# EAGLE board hs_ctia (EAGLE 7.2.0)
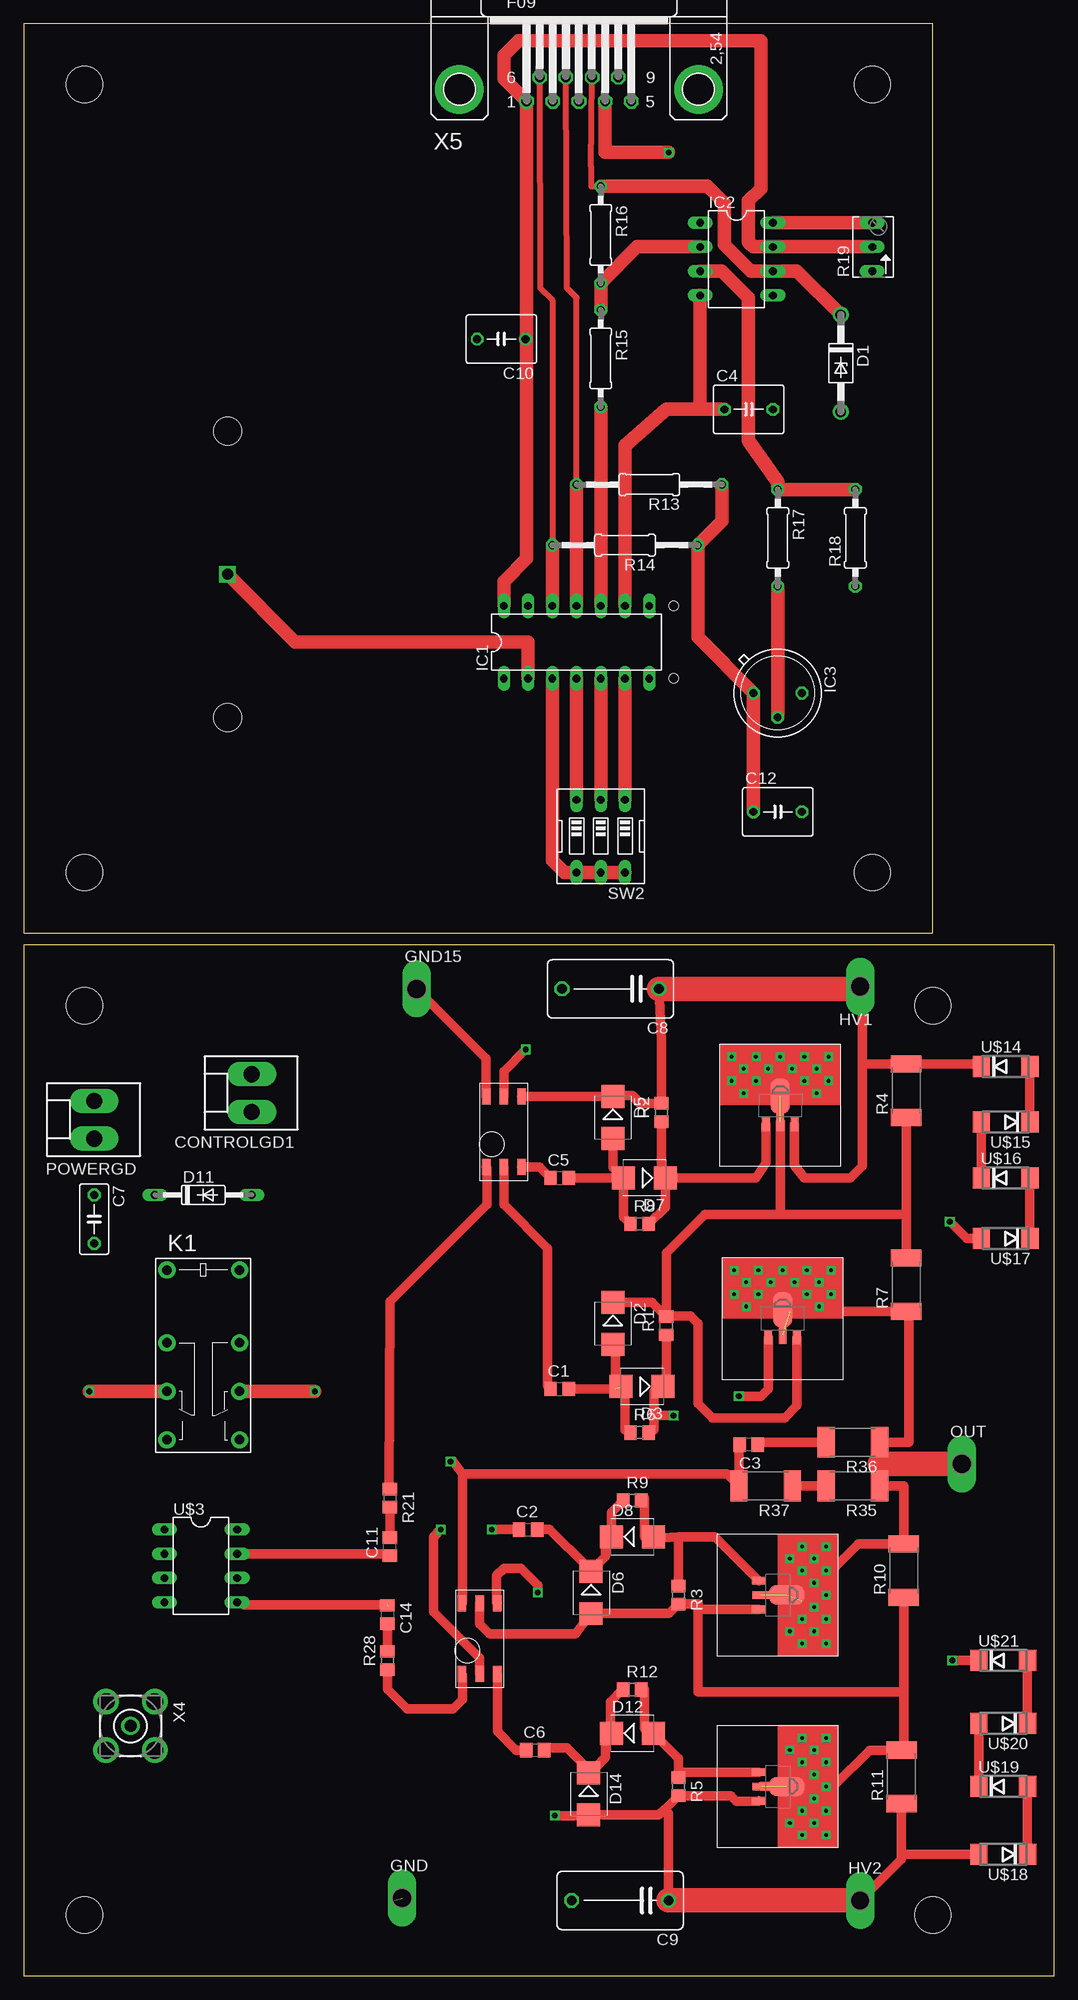
[diagram p0: board, top side]
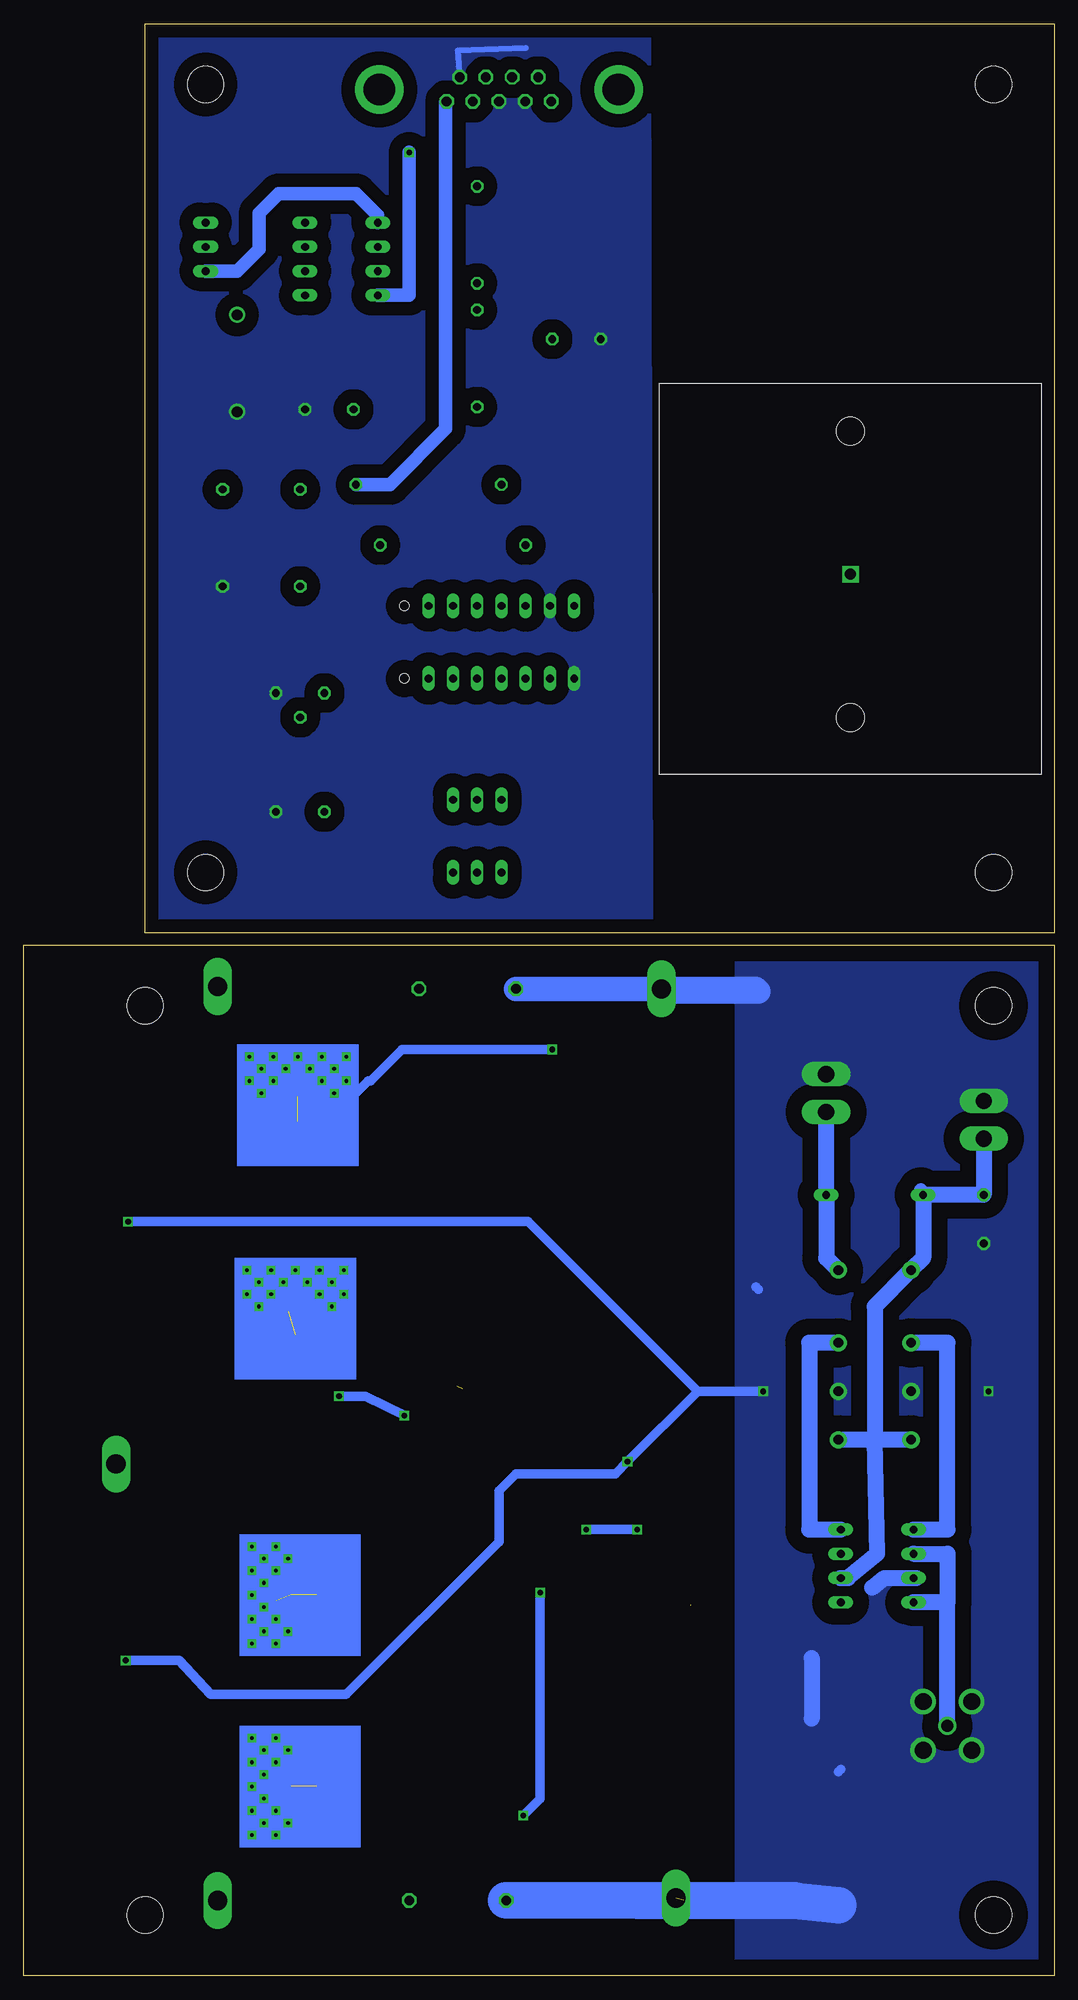
[diagram p1: board, bottom side, seen from below]

Size 107.95 x 204.47 mm. Coordinates in mm from the lower left corner, seen from the top.
Outline: 0,0 107.95,0 107.95,107.95 0,107.95 0,0
Outline: 0,109.22 95.25,109.22 95.25,204.47 0,204.47 0,109.22
Copper layers (1*16): Top 0.035mm / dielectric 1.5mm / Bottom 0.035mm
Design rules "default": minimum track width 10mil, minimum drill 24mil, track to track 8mil, track to pad 8mil, pad to pad 8mil, via to via 8mil, smd to smd 8mil, copper to edge 40mil, drill to drill 8mil, minimum pad ring 10mil, minimum via ring 8mil, stop-mask expansion 4mil, vias tented up to drill 0mil, thermal gap 10mil
Holes 3.8 mm at 95.25,101.6 95.25,6.35 6.35,6.35 6.35,101.6 6.35,198.12 88.9,198.12 88.9,115.57 6.35,115.57
Holes 1 mm at 68.07,143.51 68.07,135.89

## Footprints (pad centres in the part's own frame; a part is rotated, then mirrored left to right if it is on the bottom)
C0805 = smd 1.3 x 1.5: 1 -0.95,0; 2 0.95,0
C050-050X075 = drill 0.813 octagon: 1 -2.54,0; 2 2.54,0
C050-030X075 = drill 0.813 octagon: 1 -2.54,0; 2 2.54,0
C102-064X133 = drill 1.016 octagon: 1 -5.08,0; 2 5.08,0
KK-156-2 = drill 1.7 pad 2.184 long: 1 -1.98,0; 2 1.98,0
DO41Z10 = drill 1.118: A 5.08,0; C -5.08,0
SMB = smd 2.4 x 2.4: A 2.2,0; C -2.2,0
DO35-10 = drill 0.813 long: A 5.08,0; C -5.08,0
P1-20Y = drill 2.007 pad 2.54 long: TP 0,0
DIL14 = drill 0.813 long: 1 -7.62,-3.81; 2 -5.08,-3.81; 3 -2.54,-3.81; 4 0,-3.81; 5 2.54,-3.81; 6 5.08,-3.81; 7 7.62,-3.81; 8 7.62,3.81; 9 5.08,3.81; 10 2.54,3.81; 11 0,3.81; 12 -2.54,3.81; 13 -5.08,3.81; 14 -7.62,3.81
DIL08 = drill 0.813 long: 1 -3.81,-3.81; 2 -1.27,-3.81; 3 1.27,-3.81; 4 3.81,-3.81; 5 3.81,3.81; 6 1.27,3.81; 7 -1.27,3.81; 8 -3.81,3.81
TO39 = drill 0.813 octagon: 1 0,-2.54; 2 2.54,0; 3 0,2.54
G5V-2 = drill 1 pad 1.8: 1 -8.89,-3.81; 4 -1.27,-3.81; 6 3.81,-3.81; 8 8.89,-3.81; 9 8.89,3.81; 11 3.81,3.81; 13 -1.27,3.81; 16 -8.89,3.81
R0805 = smd 1.3 x 1.5: 1 -0.95,0; 2 0.95,0
R2512 = smd 1.8 x 3.2: 1 -2.8,0; 2 2.8,0
0207/15 = drill 0.813 octagon: 1 -7.62,0; 2 7.62,0
0207/10 = drill 0.813 octagon: 1 -5.08,0; 2 5.08,0
B64Y = drill 0.813 long: A 2.54,0; E -2.54,0; S 0,0
EDG-03 = drill 0.813 long: 1 -2.54,-3.81; 2 0,-3.81; 3 2.54,-3.81; 4 2.54,3.81; 5 0,3.81; 6 -2.54,3.81
SMD6 = smd 1.676 x 0.889: P$1 -3.696,1.854; P$2 -3.696,0; P$3 -3.696,-1.854; P$4 3.696,-1.854; P$5 3.696,0; P$6 3.696,1.854
SO89_HS = smd 0.8 x 1.4: B -1.499,-1.981; E 1.499,-1.981 | smd 0.8 x 1.9: C 0,-1.727 | smd 2.032 x 3.65: C@1 0,0.94 | drill 0.381 pad 0.61 square: P$1 -3.81,3.81; P$2 -1.27,3.81; P$3 1.27,3.81; P$4 3.81,3.81; P$5 3.81,1.27; P$8 -3.81,1.27; P$9 -2.54,5.08; P$10 -5.08,2.54; P$11 -2.54,2.54; P$12 -5.08,5.08; P$13 0,5.08; P$14 2.54,5.08; P$15 5.08,5.08; P$16 5.08,2.54; P$17 2.54,2.54
CTIA = drill 1.143 square: P$1 0,0 | hole 2.946: 14.999,0; -14.999,0
DO214AA = smd 1.8 x 2.2: A 2.55,0; C -2.55,0
BU-SMA-V = drill 1.27: 1 0,0 | drill 1.778: 2 -2.55,2.55; 3 2.55,2.55; 4 2.55,-2.55; 5 -2.55,-2.55
F09HP = drill 1.016 octagon: 1 -5.486,-1.27; 2 -2.743,-1.27; 3 0,-1.27; 4 2.743,-1.27; 5 5.486,-1.27; 6 -4.115,1.27; 7 -1.372,1.27; 8 1.372,1.27; 9 4.115,1.27 | drill 3.302 pad 5.08: G1 -12.522,0; G2 12.522,0

## Placement (x,y rotation side)
C1  1u  [C0805]  56.13,61.47 0 top
C2  1u  [C0805]  52.83,46.74 0 top
C3  10n  [C0805]  75.95,55.63 180 top
C4  10n  [C050-050X075]  75.95,164.08 0 top
C5  1u  [C0805]  56.13,83.57 0 top
C6  1u  [C0805]  53.59,23.62 0 top
C7  10n  [C050-030X075]  7.37,79.25 270 top
C8  10p  [C102-064X133]  61.47,103.38 180 top
C9  10p  [C102-064X133]  62.48,7.87 180 top
C10  10n  [C050-050X075]  50.04,171.45 180 top
C11  1u  [C0805]  38.35,44.96 90 top
C12  10n  [C050-050X075]  78.99,121.92 0 top
C14  1u  [C0805]  38.1,37.85 270 top
CONTROLGD1  [KK-156-2]  23.88,92.46 90 top
D1  [DO41Z10]  85.6,168.91 270 top
D2  1SMB5918BT3G  [SMB]  61.72,68.33 270 top
D3  [SMB]  64.77,61.72 180 top
D5  1SMB5918BT3G  [SMB]  61.72,89.92 270 top
D6  1SMB5918BT3G  [SMB]  59.44,40.13 270 top
D7  [SMB]  65.02,83.57 180 top
D8  [SMB]  63.75,45.97 0 top
D11  1N4148DO35-10  [DO35-10]  18.8,81.79 0 top
D12  [SMB]  63.75,25.4 0 top
D14  1SMB5918BT3G  [SMB]  59.18,19.05 270 top
GND  TPPAD1-20Y  [P1-20Y]  39.62,8.13 0 top
GND15  TPPAD1-20Y  [P1-20Y]  41.15,103.38 0 top
HV1  TPPAD1-20Y  [P1-20Y]  87.63,103.63 180 top
HV2  TPPAD1-20Y  [P1-20Y]  87.63,7.87 0 top
IC1  IVC102UADAPTOR  [DIL14]  57.91,139.7 0 top
IC2  OPA27GP  [DIL08]  74.68,179.83 270 top
IC3  AD580H  [TO39]  78.99,134.37 270 top
K1  G5V-2  [G5V-2]  18.8,65.02 270 top
OUT  TPPAD1-20Y  [P1-20Y]  98.3,53.59 0 top
POWERGD  [KK-156-2]  7.37,89.66 90 top
R1  100k  [R0805]  67.31,68.07 90 top
R2  100k  [R0805]  66.8,90.42 90 top
R3  100k  [R0805]  68.58,39.88 270 top
R4  10M  [R2512]  92.46,92.71 90 top
R5  100k  [R0805]  68.58,19.81 270 top
R6  10  [R0805]  64.52,56.9 0 top
R7  10M  [R2512]  92.46,72.39 90 top
R8  10  [R0805]  64.52,78.74 0 top
R9  10  [R0805]  63.75,49.78 0 top
R10  10M  [R2512]  92.2,42.42 90 top
R11  10M  [R2512]  91.95,20.83 90 top
R12  10  [R0805]  63.75,29.97 0 top
R13  10k  [0207/15]  65.53,156.21 180 top
R14  10k  [0207/15]  62.99,149.86 180 top
R15  1M  [0207/10]  60.45,169.42 270 top
R16  1M  [0207/10]  60.45,182.37 270 top
R17  1M  [0207/10]  78.99,150.62 270 top
R18  1M  [0207/10]  87.12,150.62 90 top
R19  10k  [B64Y]  88.9,181.1 90 top
R21  10  [R0805]  38.35,50.04 270 top
R28  10  [R0805]  38.1,33.02 90 top
R35  10M  [R2512]  86.87,51.31 180 top
R36  10M  [R2512]  86.87,55.88 180 top
R37  10M  [R2512]  77.72,51.31 180 top
SW2  [EDG-03]  60.45,119.38 180 top
U$1  DA-2320SMD6  [SMD6]  50.29,88.39 90 top
U$2  VN2450HS  [SO89_HS]  78.99,39.88 270 top
U$3  UCC27425  [DIL08]  18.54,42.93 270 top
U$4  VP2450HS  [SO89_HS]  79.25,91.19 0 top
U$5  VP2450HS  [SO89_HS]  79.5,68.83 0 top
U$6  VN2450HS  [SO89_HS]  78.99,19.81 270 top
U$7  DA-2320SMD6  [SMD6]  47.75,35.31 90 top
U$8  CTIA  [CTIA]  21.34,146.81 90 bottom
U$14  SMBJ170D-M3/H  [DO214AA]  102.87,95.25 0 top
U$15  SMBJ170D-M3/H  [DO214AA]  102.87,89.41 180 top
U$16  SMBJ170D-M3/H  [DO214AA]  102.87,83.57 0 top
U$17  SMBJ170D-M3/H  [DO214AA]  102.87,77.22 180 top
U$18  SMBJ170D-M3/H  [DO214AA]  102.62,12.7 180 top
U$19  SMBJ170D-M3/H  [DO214AA]  102.62,19.81 0 top
U$20  SMBJ170D-M3/H  [DO214AA]  102.62,26.42 180 top
U$21  SMBJ170D-M3/H  [DO214AA]  102.62,33.02 0 top
X4  BU-SMA-V  [BU-SMA-V]  11.18,26.16 270 top
X5  [F09HP]  58.17,197.61 0 top

## Library data of the parts
C1-C3 C5 C6 C8 C9 C11 C14 R13-R18 = resistor
C4 C7 C10 C12 R1-R12 R21 R28 R35-R37 = rcl
CONTROLGD1 POWERGD = con-molex; OC_FARNELL: unknown; OC_NEWARK: unknown
D1-D3 D5-D8 D11 D12 D14 U$14-U$21 = diode
GND GND15 HV1 HV2 OUT = testpad
IC1 = burr-brown
IC2 IC3 = linear
K1 = relay; MPN: G5V-2 5DC; OC_FARNELL: 9949488; OC_NEWARK: 78K5703
R19 = pot
SW2 = special
U$1 U$7 = trafo
U$2 U$4-U$6 = transistor-fet
U$3 = texas
U$8 = ctia
X4 = con-coax; OC_FARNELL: unknown; OC_NEWARK: unknown
X5 = con-subd; OC_FARNELL: unknown; OC_NEWARK: unknown

## Nets
+5V: C12.1 IC3.1 R13.1 R14.1 X5.5
+15V: C7.1 D11.C K1.1 K1.8 K1.9 POWERGD.1 U$3.6
+15V1: C10.1 IC1.14 IC2.7 R19.S X5.1
-15V: C4.1 IC1.9 IC2.4 X5.4
ENSW: CONTROLGD1.1 D11.A K1.16
GND: C3.2 C7.2 C8.2 C9.2 CONTROLGD1.2 GND15.TP GND.TP K1.6 K1.11 POWERGD.2 R37.2 U$1.P$6 U$3.3 U$7.P$6 U$17.A U$21.C X4.2 X4.3 X4.4 X4.5
GND1: C4.2 C10.2 C12.2 D1.A IC1.1 IC1.13 IC3.3 R18.1 X5.2 X5.3 X5.9
N$1: U$3.2 U$3.4 X4.1
N$2: C11.1 U$3.7
N$3: IC1.6 SW2.1
N$4: C14.1 U$3.5
N$5: C1.1 U$1.P$2
N$6: C8.1 D5.C HV1.TP R2.2 R4.2 U$1.P$4 U$4.E U$14.C
N$7: C5.1 U$1.P$3
N$8: D3.C R1.1 R6.2 U$5.B
N$9: D2.C R1.2 R4.1 R7.2 U$1.P$5 U$4.C U$4.C@1 U$5.E
N$10: C1.2 D2.A D3.A R6.1
N$11: D12.A R5.1 R12.2 U$6.B
N$12: D7.C R2.1 R8.2 U$4.B
N$13: IC1.5 SW2.2
N$14: K1.4 U$3.1
N$15: K1.13 U$3.8
N$16: C5.2 D5.A D7.A R8.1
N$17: IC1.4 SW2.3
N$18: IC1.3 SW2.4 SW2.5 SW2.6
N$19: IC1.10 R15.2
N$20: OUT.TP R7.1 R10.2 R35.1 R36.1 U$2.C U$2.C@1 U$5.C U$5.C@1
N$21: D6.A R3.2 R10.1 R11.2 U$2.E U$6.C U$6.C@1 U$7.P$5
N$22: C2.1 U$7.P$2
N$23: C6.1 U$7.P$3
N$24: IC2.2 R15.1 R16.2
N$25: C2.2 D6.C D8.C R9.1
N$26: IC2.3 R17.1 R18.2
N$27: C6.2 D12.C D14.C R12.1
N$28: IC3.2 R17.2
N$29: IC2.1 R19.E
N$30: IC2.8 R19.A
N$31: C9.1 D14.A HV2.TP R5.2 R11.1 U$6.E U$7.P$4 U$18.A
N$37: R21.1 U$1.P$1
N$38: C11.2 R21.2
N$39: C3.1 R36.2
N$44: R35.2 R37.1
N$45: U$14.A U$15.C
N$48: R28.1 U$7.P$1
N$49: C14.2 R28.2
N$52: U$15.A U$16.C
N$53: U$16.A U$17.C
N$54: U$18.C U$19.A
N$55: U$19.C U$20.A
N$56: U$20.C U$21.A
N$251: D8.A R3.1 R9.2 U$2.B
RESET: IC1.12 R14.2 X5.6
SAMPLE: IC1.11 R13.2 X5.7
VIN: IC1.2 U$8.P$1
VOUT: D1.C IC2.6 R16.1 X5.8

## Tracks (layer width: path | path; a pad name or v marks a point on that pad's centre or on a via)
+5V
  Top 1.422: R13.1 73.15,152.4 R14.1 70.61,140.21 IC3.1 C12.1
  Bottom 1.422: R13.1 69.6,156.21 63.75,162.05 63.75,196.24 X5.5
+15V
  Bottom 1.016: 13.72,82.3 D11.C
  Bottom 1.422: 13.97,81.79 13.97,82.3
  Bottom 1.676: D11.C 13.72,75.18 K1.1 18.8,70.1 18.8,56.13 | 18.8,56.13 18.54,44.2 21.59,41.66 U$3.6 | 18.8,56.13 K1.9 | K1.8 18.8,56.13 | POWERGD.1 C7.1 D11.C | D11.C 13.97,81.79
+15V1
  Top 1.422: 52.68,171.45 X5.1 50.29,198.73 50.29,201.17 51.82,202.69 77.22,202.69 77.22,187.2 75.95,185.93 75.95,181.61 76.45,181.1 IC2.7 R19.S | IC1.14 50.29,146.05 52.68,148.44 52.68,170.43 52.68,171.45 | C10.1 52.68,171.45
-15V  (via drill 0.6)
  Top 1.422: IC1.9 62.99,160.27 67.31,164.08 70.87,164.08 | IC2.4 70.87,164.08 | C4.1 70.87,164.08 | v67.56,191.01 60.91,191.01 X5.4
  Bottom 1.422: v67.56,191.01 67.56,176.02 IC2.4
ENSW
  Bottom 1.676: CONTROLGD1.1 D11.A 23.88,75.18 K1.16
GND  (via drill 0.6)  (1 unrouted)
  Top 1.016: v44.7,53.85 44.96,53.85 45.97,52.58 | 45.97,52.58 45.97,39.08 U$7.P$6 | U$1.P$6 48.44,96.09 GND15.TP | C3.2 74.92,55.63 R37.2 73.65,52.58 45.97,52.58 | U$17.A 98.81,77.22 v97.03,78.99 | U$21.C 99.56,33.01 v97.28,33.02
  Top 1.422: K1.6 v6.86,61.21 | K1.11 v30.48,61.21
  Bottom 1.016: 16,41.66 16,41.91 U$3.3 | 22.61,21.34 22.35,21.59 | 31.24,72.14 30.99,71.88 | v30.48,61.21 37.34,61.21 | 37.34,61.21 v44.7,53.85 45.97,52.58 56.39,52.58 58.17,50.8 58.17,45.47 74.17,29.46 88.39,29.46 91.69,33.02 v97.28,33.02 | v97.03,78.99 55.12,78.99 37.34,61.21
  Bottom 1.422: 38.61,8.13 38.86,7.87
  Bottom 1.676: 25.4,33.27 25.4,26.92 | 19.05,40.64 17.78,41.66 16,41.66 U$3.3 14.48,41.66
  Bottom 2.54: C8.2 GND15.TP | GND15.TP 31.24,103.38 30.99,103.12 40.89,103.12 GND15.TP
  Bottom 3.81: 43.64,7.82 27.18,7.85 | 27.18,7.85 22.61,7.37 | C9.2 38.86,7.87 27.18,7.87 27.18,7.85
  pour Bottom (isolate 1.676, no thermals): 0,107.44 33.27,107.44 33.27,0.76 0,0.76
GND1
  Bottom 0.61: 55.37,201.93 62.48,201.68 X5.9
  pour Bottom (isolate 1.422, no thermals): 42.42,204.22 95.5,204.47 95.25,109.22 42.16,109.22
N$1
  Bottom 1.676: X4.1 11.18,39.12 | U$3.2 11.18,44.2 11.18,39.12 | 11.18,39.12 U$3.4
N$2
  Top 1.016: U$3.7 38.35,44.2 C11.1
N$3
  Top 1.422: SW2.1 IC1.6
N$4  (1 unrouted)
  Top 1.016: 38.1,38.86 23.11,38.86 U$3.5
N$5
  Top 1.016: U$1.P$2 50.29,80.77 54.86,76.2 54.86,61.79 C1.1
N$6
  Top 1.016: C8.1 66.8,97.98 R2.2 64.58,91.37 63.75,92.2 61.81,92.2 D5.C 52.17,92.12 U$1.P$4 | U$4.E 80.75,84.86 81.79,83.57 86.61,83.57 87.88,84.84 87.88,95.76 | 87.88,95.76 87.88,103.12 87.63,103.38 | 87.88,95.76 88.13,95.51 R4.2 100.06,95.51 U$14.C
  Top 2.54: C8.1 87.63,103.38 HV1.TP
N$7
  Top 1.016: U$1.P$3 54.05,84.7 C5.1
N$8  (via drill 0.6)
  Top 1.016: 66.04,59.18 66.04,61.21 D3.C 67.31,62.06 R1.1 | 66.04,59.18 66.04,57.15 R6.2 | U$5.B 78,61.49 77.22,60.71 v74.93,60.71 | v68.07,58.67 66.55,58.67 66.04,59.18
  Bottom 1.016: v74.93,60.71 72.14,60.71 v68.07,58.67
N$9  (via drill 0.6)  (2 unrouted)
  Top 1.016: 81,63.34 U$5.E 81,59.72 79.76,58.42 72.14,58.42 70.61,59.94 70.61,68.33 69.85,69.09 67.38,69.09 R1.2 | U$1.P$5 50.29,94.74 v52.58,97.03 | R4.1 92.46,79.76 | 92.46,79.76 R7.2 | U$4.C 79.25,79.76 | 79.25,79.76 92.46,79.76 | D2.C 65.81,70.53 R1.2 | R1.2 67.31,75.69 71.37,79.76 79.25,79.76
  Bottom 1.016: v52.58,97.03 68.33,97.03 71.63,93.73 71.88,93.73 73.41,92.2 79.17,92.2 U$4.C@1
N$10  (1 unrouted)
  Top 1.016: R6.1 62.99,57.15 62.99,61.21 D3.A 61.98,62.23 61.98,65.28 D2.A | C1.2 61.98,61.47
N$11
  Top 1.016: R12.2 65.02,29.97 65.02,25.91 D12.A 68.58,22.77 R5.1 69.13,21.31 U$6.B
N$12
  Top 1.016: R2.1 66.8,83.99 D7.C | D7.C 67.22,80.5 R8.2 | U$4.B 77.75,85.11 76.71,83.57 D7.C
N$13
  Top 1.422: SW2.2 IC1.5
N$14
  Bottom 1.676: U$3.1 11.18,46.74 11.18,66.29 K1.4
N$15
  Bottom 1.676: K1.13 25.65,66.29 25.65,46.74 U$3.8
N$16
  Top 1.016: C5.2 D7.A | D7.A 62.82,79.48 R8.1 | D5.A 61.72,84.67 D7.A
N$17
  Top 1.422: SW2.3 IC1.4
N$18
  Top 1.422: SW2.6 SW2.5 SW2.4 56.64,115.57 55.37,116.84 IC1.3
N$19
  Top 1.422: IC1.10 R15.2
N$20  (3 unrouted)
  Top 1.016: 81.5,39.28 87.44,45.22 R10.2 92.2,51.31 R35.1 89.67,53.59 R36.1 92.71,55.88 92.71,69.59 R7.1 80.26,69.59 80.26,69.85 79.5,69.85 U$5.C@1
  Top 2.54: OUT.TP 89.67,53.59
N$21  (1 unrouted)
  Top 1.016: 59.1,37.59 D6.A | D6.A 67.58,37.93 R3.2 70.68,38.93 70.65,38.38 | R10.1 92.2,29.72 | 92.2,29.72 92.2,23.63 R11.2 91.43,23.62 88.65,23.62 84.84,19.81 U$6.C | 92.2,29.72 70.61,29.72 70.61,37.72 70.65,38.38 | U$2.E 70.65,38.38 | U$7.P$5 47.75,36.83 48.77,35.81 57.83,35.81 D6.A
N$22  (via drill 0.6)
  Top 1.016: U$7.P$2 47.75,33.27 42.93,38.1 42.93,45.97 v43.69,46.74 | v49.02,46.74 C2.1
  Bottom 1.016: v43.69,46.74 v49.02,46.74
N$23
  Top 1.016: 52.83,23.81 C6.1 51.56,23.62 49.61,25.58 U$7.P$3
N$24
  Top 1.422: R15.1 R16.2 64.26,181.1 IC2.2
N$25
  Top 1.016: 58.93,42.93 59.03,42.8 | 59.03,42.8 D6.C 59.94,42.93 60.96,43.94 60.96,45.97 D8.C 61.55,48.53 R9.1 | C2.2 55.1,46.74 59.03,42.8
N$26
  Top 1.422: R18.2 R17.1 78.99,156.46 75.95,160.78 75.95,175.77 73.15,178.56 IC2.3
N$27
  Top 1.016: C6.2 54.86,23.88 56.9,23.88 58.93,21.84 D14.C 59.94,21.84 60.96,22.86 60.96,24.89 D12.C 61.47,25.49 61.47,28.7 62.74,29.97 R12.1
N$28
  Top 1.422: IC3.2 R17.2
N$29
  Bottom 1.422: R19.E 85.6,178.56 83.31,180.85 83.31,184.66 81.28,186.69 73.15,186.69 70.87,184.4 IC2.1
N$30
  Top 1.422: R19.A IC2.8
N$31  (via drill 0.6)
  Top 1.016: v55.63,16.76 59.1,16.76 D14.A 66.57,16.85 67.15,17.43 | 67.15,17.43 R5.2 74.1,18.86 74.68,18.29 76.99,18.29 U$6.E | R11.1 91.94,17.53 91.94,12.45 | C9.1 67.56,17.02 67.15,17.43 | 91.94,12.45 91.94,12.19 HV2.TP | U$18.A 92.19,12.69 91.94,12.45 | v53.85,40.13 53.85,40.89 52.07,42.67 50.29,42.67 49.53,41.91 49.53,39.08 U$7.P$4
  Top 2.54: HV2.TP C9.1
  Bottom 1.016: v53.85,40.13 53.85,18.54 v55.63,16.76
N$37
  Top 1.016: U$1.P$1 48.51,84.62 48.51,80.77 38.35,70.61 38.29,51.05 R21.1
N$38
  Top 1.016: R21.2 C11.2
N$39
  Top 1.016: R36.2 76.9,55.88 C3.1
N$44
  Top 1.016: R37.1 R35.2
N$45
  Top 1.016: U$14.A U$15.C
N$48
  Top 1.016: U$7.P$1 45.97,31.53 45.97,28.96 44.96,27.94 40.13,27.94 38.1,29.97 R28.1
N$49
  Top 1.016: C14.2 R28.2
N$52
  Top 1.016: U$15.A U$16.C
N$53
  Top 1.016: U$16.A U$17.C
N$54
  Top 1.016: U$18.C U$19.A
N$55
  Top 1.016: U$19.C U$20.A
N$56
  Top 1.016: U$20.C U$21.A
N$251
  Top 1.016: R9.2 65.02,50.04 65.02,45.97 D8.A 65.95,45.81 68.58,45.97 | R3.1 68.58,45.97 | 68.58,45.97 72.42,45.97 U$2.B
RESET
  Top 0.61: X5.6 54.1,176.78 55.37,175.51 R14.2
  Top 1.422: IC1.12 R14.2
SAMPLE
  Top 0.61: R13.2 57.91,175.77 56.9,176.78 X5.7
  Top 1.422: R13.2 IC1.11
VIN
  Top 1.422: U$8.P$1 28.45,139.7 52.83,139.7 IC1.2
VOUT
  Top 0.61: X5.8 59.44,189.48 59.44,187.45 R16.1
  Top 1.422: D1.C 81.03,178.56 IC2.6 76.2,178.56 73.41,181.36 73.41,185.67 71.63,187.45 R16.1